# Altium PCB DE-120824.PcbDoc (part 2 of 2)
Units mil, origin at the board's own origin, x right, y up, seen from the top; angles counter-clockwise.
Board outline 2677.17 x 5787.4 mil, 4 copper layers (Top Layer, GND, PWR, Bottom Layer), stack 30.634 mil thick; 144 components, 186 nets, 562 pads, 68 vias.
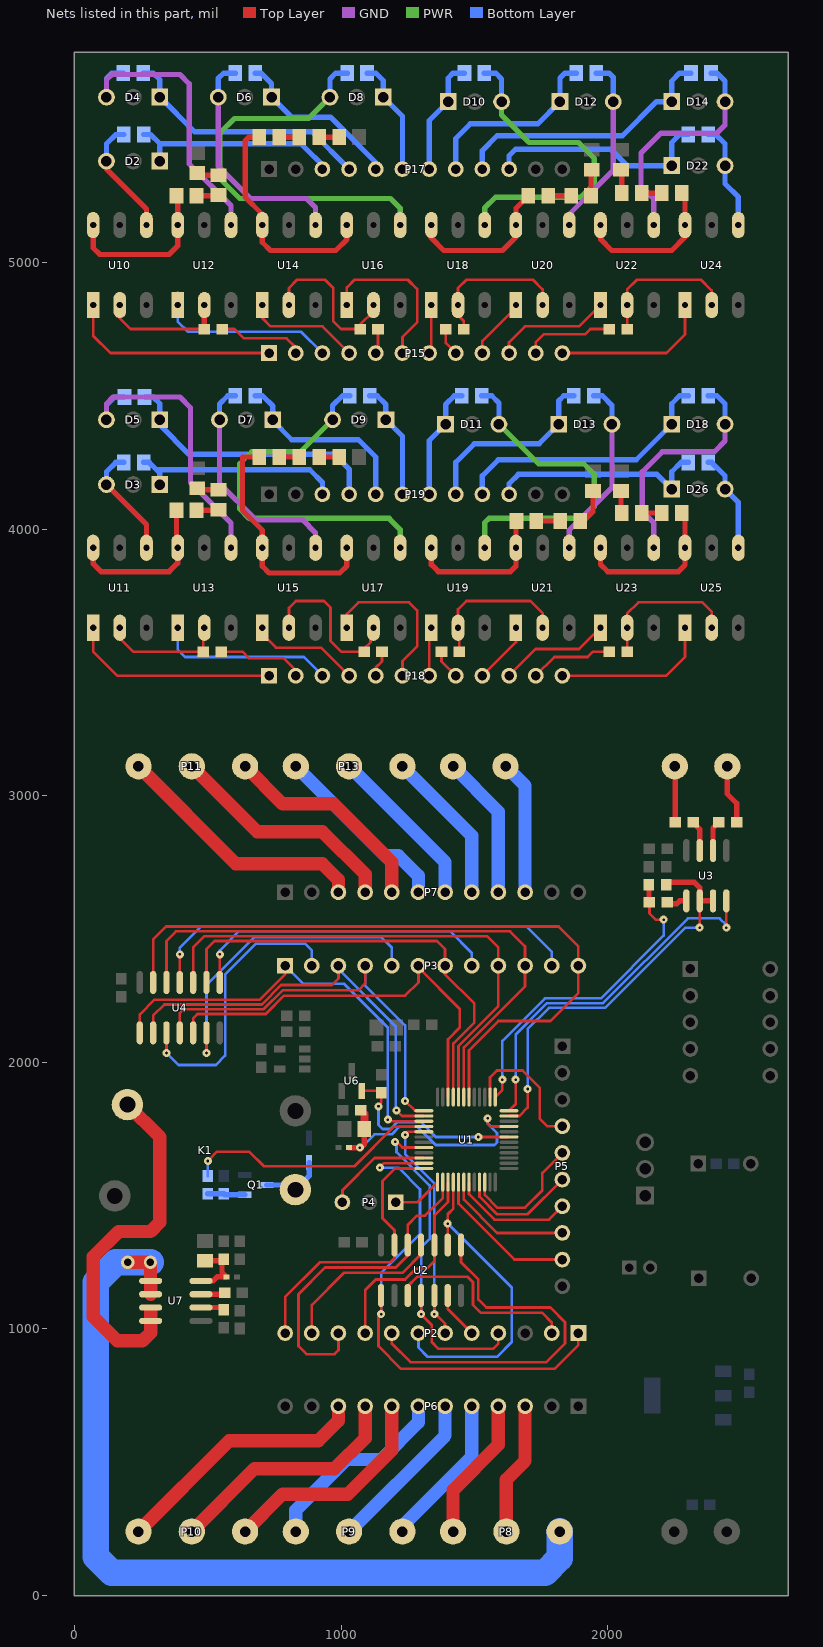
[diagram p4: the nets of this part, all layers, seen from the top]

## Via types
v1: diameter 30, hole 10, Top Layer to Bottom Layer, 56 vias
v2: diameter 50, hole 28, Top Layer to Bottom Layer, 12 vias

## Nets (pads, with @x,y where several pads share a name; then routed paths per layer and width w, separated by ;. In a path a pad name is that pad's centre, name@x,y a point inside that pad or via, vN(x,y) a via of type N, cw(c..) or ccw(c..) an arc to the next point about the centre after c; other vN are vias at no path point) (continued)
JAL0_UP: P2.1 U1.35 U2.1 | length 1947.5
  Top Layer w10: v1(1145,1605) 1161.42,1621.42 U1.35@1310.55,1621.42 ; U2.1@1150,1125.51 v1(1150,1055) 1140,1045 1140,935 1225,850 1800,850 1890,940 P2.1@1890,984.25
  Bottom Layer w10: v1(1145,1605) 1214.54,1605 1296,1523.54 1296,1356 1150,1210 v1(1150,1055)
JAL1_DN: P2.6 U1.29 U2.5 | length 952.9
  Top Layer w10: v1(1240,1728) 1240,1730 1249.53,1739.53 U1.29@1310.55,1739.53 ; U2.5@1350,1125.51 1350,1060 1390,1020 P2.6@1390,984.25
  Bottom Layer w10: v1(1240,1728) 1240,1655.91 1350,1545.91 v1(1350,1055)
JAL1_UP: P2.4 U1.32 U2.4 | length 1334.9
  Top Layer w10: v1@1207.5,1702.5 1229.53,1680.47 U1.32@1310.55,1680.47 ; U2.4@1300,1125.51 v1(1300,1055) 1340,1015 1340,950 1365,925 1570,925 1590,945 P2.4@1590,984.25
  Bottom Layer w10: v1@1207.5,1702.5 1207.5,1662.96 1332,1538.46 1332,1336.54 1300,1304.54 v1(1300,1055) v1@1310.4,1055
  other v1: 1202.5,1701.5
JAL2_DN: P2.9 U1.39 U2.10 | length 783
  Top Layer w10: P2.9@1090,984.25 1090,1145 1130,1185 1240,1185 1280,1225 1320,1225 1350,1255 U2.10@1350,1314.49 1350,1425 1401.1,1476.1 U1.39@1401.1,1550.55
JAL2_UP: P2.7 U1.40 U2.9 | length 1220.6
  Top Layer w10: U2.9@1400,1314.49 v1@1400,1385 ; v1(1400,1395) 1400,1430 1420.79,1450.79 U1.40@1420.79,1550.55
  Bottom Layer w10: P2.7@1290,984.25 1290,930 1325,895 1585,895 1640,950 1640,1155 v1(1400,1395)
JAL3_DN: P2.12 U1.36 U2.13 | length 1089.4
  Top Layer w10: P2.12@790,984.25 790,1120 920,1250 1185,1250 1200,1265 U2.13@1200,1314.49 1200,1370 1155,1415 1155,1555 1201.73,1601.73 U1.36@1310.55,1601.73
JAL3_UP: P2.10 U1.38 U2.12 | length 1245.5
  Top Layer w10: P2.10@990,984.25 990,920 975,905 870,905 840,935 840,1130 940,1230 1205,1230 1250,1275 U2.12@1250,1314.49 1250,1390 1285,1425 1315,1425 1381.42,1491.42 U1.38@1381.42,1550.55
JAL4_DN: P3.3 U1.26 U4.2 | length 1613.9
  Top Layer w10: U4.2@295,2110.51 295,2175 337,2217 702.46,2217 775.46,2290 965,2290 990,2315 P3.3@990,2362.2 ; v1(1207.5,1820) 1228.92,1798.58 U1.26@1310.55,1798.58
  Bottom Layer w10: P3.3@990,2362.2 990,2350 1205,2135 1205,1817.5 v1@1202.5,1815
JAL4_UP: P3.1 U1.27 U4.1 | length 1673.1
  Top Layer w10: U4.1@245,2110.51 245,2180 300,2235 695,2235 790,2330 P3.1@790,2362.2 ; v1(1175,1785) 1181.1,1778.9 U1.27@1310.55,1778.9
  Bottom Layer w10: P3.1@790,2362.2 857.2,2295 1010,2295 1175,2130 v1(1175,1785)
JAL5_DN: P3.6 U1.22 U4.5 | length 1585.5
  Top Layer w10: U4.5@445,2110.51 445,2165 461,2181 717.37,2181 786.37,2250 1240,2250 1290,2300 P3.6@1290,2355 ; P3.6@1290,2362.2 P3.6@1290,2355 ; U1.22@1401.1,1869.45 1401.1,2086.1 1445,2130 1445,2200 P3.6@1290,2355
JAL5_UP: P3.4 U1.25 U4.4 | length 1535.4
  Top Layer w10: U4.4@395,2110.51 395,2185 409,2199 709.91,2199 780.91,2270 1065,2270 1090,2295 P3.4@1090,2362.2 ; v1(1240,1855) 1276.73,1818.27 U1.25@1310.55,1818.27
  Bottom Layer w10: P3.4@1090,2362.2 1090,2287.66 1240,2137.66 v1@1240,1857
JAL6_DN: P3.9 U1.20 U4.10 | length 1933.6
  Top Layer w10: U4.10@445,2299.49 445,2430 488,2473 1547,2473 1590,2430 P3.9@1590,2362.2 1590,2210.46 1440.47,2060.93 U1.20@1440.47,1869.45
JAL6_UP: P3.7 U1.21 U4.9 | length 1679.3
  Top Layer w10: U4.9@495,2299.49 495,2425 525,2455 1360,2455 1390,2425 P3.7@1390,2362.2 1390,2330 1500,2220 1500,2150 1420.79,2070.79 U1.21@1420.79,1869.45
JAL7_DN: P3.12 U1.18 U4.13 | length 2656.1
  Top Layer w10: U4.13@295,2299.49 295,2460 344,2509 1816,2509 1890,2435 P3.12@1890,2362.2 1890,2260 1785,2155 1590,2155 1479.84,2044.84 U1.18@1479.84,1869.45
JAL7_UP: P3.10 U1.19 U4.12 | length 2199.4
  Top Layer w10: U4.12@345,2299.49 345,2455 381,2491 1634,2491 1690,2435 P3.10@1690,2362.2 1690,2285 1460.16,2055.16 U1.19@1460.16,1869.45
JAL_0_DN: P6.4 P8.1 | length 540.4
  Top Layer w50: P8.1@1420,240 1420,395 1590,565 P6.4@1590,710
JAL_0_UP: P6.3 P8.2 | length 499
  Top Layer w50: P8.2@1620,240 1620,435 1690,505 P6.3@1690,710
JAL_1_DN: P6.6 P9.2 | length 619.1
  Bottom Layer w50: P9.2@1030,240 1390,600 P6.6@1390,710
JAL_1_UP: P6.5 P9.3 | length 577.7
  Bottom Layer w50: P9.3@1230,240 1230,260 1490,520 P6.5@1490,710
JAL_2_DN: P6.8 P10.3 | length 841.3
  Top Layer w50: P10.3@640,240 780,380 1025,380 1190,545 P6.8@1190,710
JAL_2_UP: P6.7 P9.1 | length 736.7
  Bottom Layer w50: P9.1@830,240 830,320 1020,510 1150,510 1290,650 P6.7@1290,710
JAL_3_DN: P6.10 P10.1 | length 976.9
  Top Layer w50: P10.1@240,240 580,580 915,580 990,655 P6.10@990,710
JAL_3_UP: P6.9 P10.2 | length 915
  Top Layer w50: P10.2@440,240 675,475 975,475 1090,590 P6.9@1090,710
JAL_4_DN: P7.4 P11.2 | length 885
  Top Layer w50: P11.2@440,3110 685,2865 930,2865 1090,2705 P7.4@1090,2637.8
JAL_4_UP: P7.3 P11.3 | length 973.2
  Top Layer w50: P11.3@240,3110 605,2745 930,2745 990,2685 P7.3@990,2637.8
JAL_5_DN: P7.6 P13.3 | length 692
  Bottom Layer w50: P13.3@830,3110 1165,2775 1215,2775 1290,2700 P7.6@1290,2637.8
JAL_5_UP: P7.5 P11.1 | length 811.3
  Top Layer w50: P11.1@640,3110 780,2970 970,2970 1190,2750 P7.5@1190,2637.8
JAL_6_DN: P7.8 P13.1 | length 579.9
  Bottom Layer w50: P13.1@1230,3110 1490,2850 P7.8@1490,2637.8
JAL_6_UP: P7.7 P13.2 | length 621.3
  Bottom Layer w50: P13.2@1030,3110 1390,2750 P7.7@1390,2637.8
JAL_7_DN: P7.10 P14.1 | length 502.5
  Bottom Layer w50: P14.1@1616.85,3110 1690,3036.85 P7.10@1690,2637.8
JAL_7_UP: P7.9 P14.2 | length 542.6
  Bottom Layer w50: P14.2@1420,3110 1590,2940 P7.9@1590,2637.8
L: P8.3 U7.1 U7.2 | length 3358.9
  Top Layer w50: v2(200,1250) v2(285,1250) 285,1180.51 U7.1@285.51,1180 U7.2@285.51,1130
  Bottom Layer w100: v2(285,1250) v2(200,1250) 155,1250 80,1175 80,145 140,85 1765,85 1820,140 P8.3@1820,240
LED_C1: P5.7 U1.43 | length 455.7
  Top Layer w10: U1.43@1479.84,1550.55 1479.84,1505.16 1575,1410 1780,1410 P5.7@1830,1460
LED_C2: P5.8 U1.42 | length 487.3
  Top Layer w10: U1.42@1460.16,1550.55 1460.16,1484.84 1585,1360 P5.8@1830,1360
LED_C3: P5.9 U1.41 | length 557.3
  Top Layer w10: U1.41@1440.47,1550.55 1440.47,1469.53 1650,1260 P5.9@1830,1260
LED_R1: P5.4 U1.14 | length 510
  Top Layer w10: U1.14@1558.58,1869.45 1558.58,1943.58 1584,1969 1681,1969 1745,1905 1745,1790 1775,1760 P5.4@1830,1760
LED_R2: P5.5 U1.46 | length 482.4
  Top Layer w10: U1.46@1538.9,1550.55 1538.9,1501.56 1585.46,1455 1690,1455 1755,1520 1755,1585 P5.5@1830,1660
LED_R3: P5.6 U1.45 | length 446.6
  Top Layer w10: U1.45@1519.21,1550.55 1519.21,1495.79 1585,1430 1700,1430 P5.6@1830,1560
LEDC1: 
LEDC2: 
LEDC3: 
LEDR1: 
LEDR2: 
LEDR3: 
NetC6_2: C6.2 C7.2 L1.2 U1.9 | length 982.8
  Top Layer w10: v1(1550,1790) 1550,1770 1560.79,1759.21 U1.9@1629.45,1759.21
  Top Layer w20: L1.2@1029.69,1680 1075,1680 1087.4,1692.4 C6.2@1087.4,1750
  Top Layer w30: C7.2@1073.46,1820 1087.4,1806.06 C6.2@1087.4,1750
  Bottom Layer w10: v1@1072.5,1677.5 1125,1730 1190,1730 1218,1758 1287,1758 1355,1690 1575,1690 1585,1700 1585,1735 1550,1770 v1(1550,1790)
  other v1: 1070,1680
NetC10_2: C10.2 C11.2 L2.1 U7.8 | length 232.5
  Top Layer w20: U7.8@474.49,1180 520,1180 535,1195 L2.1@570.32,1195 553.46,1211.85 553.46,1255 C10.2@490,1255
NetC13_2: C13.2 U7.6 | length 88.9
  Top Layer w20: U7.6@474.49,1080 551.93,1080 C13.2@560,1071.93
NetD1_2: D1.2 K1.1 Q1.3 | length 237.2
  Bottom Layer w20: Q1.3@721.34,1540 810.94,1540 K1.1@828.58,1522.36 880,1573.78 D1.2@880,1623.74
NetD2_1: D2.1 P17.3 R19.2 | length 808.8
  Bottom Layer w20: R19.2@260,5480 285,5480 320,5445 850,5445 945,5350 P17.3@930,5350 ; D2.1@320,5380 320,5435
NetD2_3: D2.3 R19.1 U10.4 | length 446.8
  Top Layer w20: D2.3@120,5380 120,5350 270,5200 U10.4@270,5140
  Bottom Layer w20: D2.3@120,5380 120,5445 155,5480 R19.1@185.2,5480
NetD3_1: D3.1 P19.3 R21.2 | length 806.8
  Bottom Layer w20: R21.2@260,4250 280,4250 307.5,4222.5 ; D3.1@320,4166.93 320,4210 307.5,4222.5 ; P19.3@930,4130 930,4175 882.5,4222.5 307.5,4222.5
NetD3_3: D3.3 R21.1 U11.4 | length 426.8
  Top Layer w20: D3.3@120,4166.93 270,4016.93 U11.4@270,3930
  Bottom Layer w20: D3.3@120,4166.93 120,4215 155,4250 R21.1@185.2,4250
NetD4_1: D4.1 P17.4 R22.2 | length 959.8
  Bottom Layer w20: R22.2@257.4,5710 295,5710 320,5685 D4.1@320,5620 450,5490 890,5490 P17.4@1030,5350
NetD4_3: D4.3 R22.1 U12.4 | length 1133.8
  GND w20: D4.3@120,5620 120,5685 140,5705 395,5705 430,5670 430,5370 587.14,5212.86 U12.4@587.14,5140
  Bottom Layer w20: D4.3@120,5620 120,5690 140,5710 R22.1@182.6,5710
NetD5_1: D5.1 P19.4 R23.2 | length 1021.3
  Bottom Layer w20: R23.2@262.4,4495 295,4495 320,4470 D5.1@320,4410 320,4390 430,4280 975,4280 1030,4225 P19.4@1030,4130
NetD5_3: D5.3 R23.1 U13.4 | length 1125
  GND w20: D5.3@120,4410 120,4470 145,4495 395,4495 435,4455 435,4175 587.14,4022.86 U13.4@587.14,3930
  Bottom Layer w20: D5.3@120,4410 120,4465 150,4495 R23.1@187.6,4495
NetD6_1: D6.1 P17.5 R31.2 | length 646.2
  Bottom Layer w20: R31.2@677.4,5710 700,5710 739.08,5670.92 D6.1@739.08,5620 814.08,5545 960,5545 1130,5375 P17.5@1130,5350
NetD6_3: D6.3 R31.1 U14.4 | length 895.6
  GND w20: D6.3@539.08,5620 539.08,5360.92 660,5240 870,5240 904.29,5205.71 U14.4@904.29,5140
  Bottom Layer w20: D6.3@539.08,5620 539.08,5689.08 560,5710 R31.1@602.6,5710
NetD7_1: D7.1 P19.5 R33.2 | length 720.1
  Bottom Layer w20: R33.2@677.4,4500 705,4500 744,4461 D7.1@744,4410 744,4406 815,4335 1065,4335 1130,4270 P19.5@1130,4130
NetD7_3: D7.3 R33.1 U15.4 | length 862.2
  GND w20: D7.3@544,4410 544,4171 680,4035 855,4035 904.29,3985.71 U15.4@904.29,3930
  Bottom Layer w20: D7.3@544,4410 544,4469 575,4500 R33.1@602.6,4500
NetD8_1: D8.1 P17.6 R34.2 | length 434
  Bottom Layer w20: R34.2@1097.4,5710 1130,5710 1158.16,5681.84 D8.1@1158.16,5620 1230,5548.16 P17.6@1230,5350
NetD8_3: D8.3 R34.1 U16.4 | length 1566.9
  PWR w20: D8.3@958.16,5620 878.16,5540 600,5540 545,5485 545,5315 620,5240 1185,5240 1221.43,5203.57 U16.4@1221.43,5140
  Bottom Layer w20: D8.3@958.16,5620 958.16,5688.16 980,5710 R34.1@1022.6,5710
NetD9_1: D9.1 P19.6 R35.2 | length 436.9
  Bottom Layer w20: R35.2@1107.4,4500 1135,4500 1168,4467 D9.1@1168,4410 1230,4348 P19.6@1230,4130
NetD9_3: D9.3 R35.1 U17.4 | length 1420.9
  PWR w20: D9.3@968,4410 848,4290 665,4290 620,4245 620,4075 655,4040 1180,4040 1221.43,3998.57 U17.4@1221.43,3930
  Bottom Layer w20: D9.3@968,4410 968,4463 1005,4500 R35.1@1032.6,4500
NetD10_1: D10.1 P17.7 R43.2 | length 439.9
  Bottom Layer w20: P17.7@1330,5350 1330,5531.23 D10.1@1401.84,5603.07 1401.84,5691.84 1420,5710 R43.2@1462.6,5710
NetD10_3: D10.3 R43.1 U18.4 | length 1232.1
  PWR w20: U18.4@1538.57,5140 1538.57,5203.57 1580,5245 1900,5245 1950,5295 1950,5390 1890,5450 1705,5450 1601.84,5553.16 D10.3@1601.84,5603.07
  Bottom Layer w20: R43.1@1537.4,5710 1580,5710 1601.84,5688.16 D10.3@1601.84,5603.07
NetD11_1: D11.1 P19.7 R45.2 | length 436.9
  Bottom Layer w20: P19.7@1330,4130 1330,4331.07 D11.1@1392,4393.07 1392,4467 1425,4500 R45.2@1452.6,4500
NetD11_3: D11.3 R45.1 U19.4 | length 1242.1
  PWR w20: U19.4@1538.57,3930 1538.57,4023.57 1555,4040 1905,4040 1950,4085 1950,4205 1910,4245 1740.07,4245 D11.3@1592,4393.07
  Bottom Layer w20: R45.1@1527.4,4500 1565,4500 1592,4473 D11.3@1592,4393.07
NetD12_1: D12.1 P17.8 R46.2 | length 720.5
  Bottom Layer w20: P17.8@1430,5350 1430,5465 1485,5520 1737.85,5520 D12.1@1820.92,5603.07 1820.92,5690.92 1840,5710 R46.2@1882.6,5710
NetD12_3: D12.3 R46.1 U20.4 | length 692.6
  GND w20: U20.4@1855.71,5140 1855.71,5180.71 2020.92,5345.92 D12.3@2020.92,5603.07
  Bottom Layer w20: R46.1@1957.4,5710 2005,5710 2020.92,5694.08 D12.3@2020.92,5603.07
NetD13_1: D13.1 P19.8 R47.2 | length 717.7
  Bottom Layer w20: P19.8@1430,4130 1430,4250 1500,4320 1742.93,4320 D13.1@1816,4393.07 1816,4481 1835,4500 R47.2@1872.6,4500
NetD13_3: D13.3 R47.1 U21.4 | length 683.9
  GND w20: U21.4@1855.71,3930 1855.71,3995.71 2016,4156 D13.3@2016,4393.07
  Bottom Layer w20: R47.1@1947.4,4500 1980,4500 2016,4464 D13.3@2016,4393.07
NetD14_1: D14.1 P17.9 R56.2 | length 1017.8
  Bottom Layer w20: P17.9@1530,5350 1530,5420 1585,5475 2055,5475 2183.07,5603.07 D14.1@2240,5603.07 2240,5680 2270,5710 R56.2@2312.6,5710
NetD14_3: D14.3 R56.1 U22.4 | length 878.3
  GND w20: U22.4@2172.86,5140 2172.86,5237.14 2125,5285 2125,5410 2200,5485 2410,5485 2440,5515 D14.3@2440,5603.07
  Bottom Layer w20: R56.1@2387.4,5710 2410,5710 2440,5680 D14.3@2440,5603.07
NetD15_1: 
NetD18_1: D18.1 P19.9 R59.2 | length 1011.9
  Bottom Layer w20: P19.9@1530,4130 1530,4200 1590,4260 2106.93,4260 D18.1@2240,4393.07 2240,4470 2270,4500 R59.2@2302.6,4500
NetD18_3: D18.3 R59.1 U23.4 | length 875.4
  GND w20: U23.4@2172.86,3930 2172.86,4022.14 2130,4065 2130,4215 2205,4290 2400,4290 2440,4330 D18.3@2440,4393.07
  Bottom Layer w20: R59.1@2377.4,4500 2410,4500 2440,4470 D18.3@2440,4393.07
NetD19_1: 
NetD22_1: D22.1 P17.10 R61.2 | length 858
  Bottom Layer w20: P17.10@1630,5350 1630,5400 1655,5425 2010,5425 2071.93,5363.07 D22.1@2240,5363.07 2240,5450 2270,5480 R61.2@2302.6,5480
NetD22_3: D22.3 R61.1 U24.4 | length 402.8
  Bottom Layer w20: R61.1@2377.4,5480 2405,5480 2440,5445 D22.3@2440,5363.07 2440,5295 2490,5245 U24.4@2490,5140
NetD23_1: 
NetD26_1: D26.1 P19.10 R62.2 | length 829.4
  Bottom Layer w20: P19.10@1630,4130 1630,4170 1665,4205 2185,4205 D26.1@2240,4150 2240,4215 2275,4250 R62.2@2302.6,4250
NetD26_3: D26.3 R62.1 U25.4 | length 374
  Bottom Layer w20: R62.1@2377.4,4250 2390,4250 2440,4200 D26.3@2440,4150 2490,4100 U25.4@2490,3930
NetK1_4: K1.4 U7.3 U7.4 | length 1365.5
  Top Layer w50: K1.4@198.66,1841.26 320,1719.92 320,1400 285,1365 165,1365 70,1270 70,1045 160,955 255,955 285.51,985.51 U7.4@285.51,1030 285.51,1064.49 285,1065
NetP1_1: P1.1 R3.1 | length 210.6
  Top Layer w20: P1.1@2251.57,3110 2253.07,3108.5 R3.1@2253.07,2900
NetP1_2: P1.2 R2.1 | length 224.5
  Top Layer w20: P1.2@2448.43,3110 2448.43,3006.57 2483.46,2971.54 R2.1@2483.46,2900
NetP2_2: P2.2 U2.3 | length 749.9
  Top Layer w10: U2.3@1250,1125.51 1250,1160 1285,1195 1475,1195 1495,1175 1495,1090 1525,1060 1755,1060 1790,1025 P2.2@1790,984.25
NetP2_5: P2.5 U2.6 | length 178.5
  Top Layer w10: U2.6@1400,1125.51 1400,1074.25 P2.5@1490,984.25
NetP2_8: P2.8 U2.8 | length 1418.9
  Top Layer w10: P2.8@1190,984.25 1190,945 1260,875 1770,875 1840,945 1840,1025 1785,1080 1545,1080 1515,1110 1515,1185 1450,1250 U2.8@1450,1314.49
NetP2_11: P2.11 U2.11 | length 628.9
  Top Layer w10: P2.11@890,984.25 890,1090 1010,1210 1230,1210 1300,1280 U2.11@1300,1314.49
NetP3_2: P3.2 U4.3 | length 1074.4
  Top Layer w10: v1(345,2035) U4.3@345,2110.51
  Bottom Layer w10: v1(345,2035) 390,1990 530,1990 565,2025 565,2330 680,2445 865,2445 890,2420 P3.2@890,2362.2
NetP3_5: P3.5 U4.6 | length 1184.4
  Top Layer w10: v1(495,2035) U4.6@495,2110.51
  Bottom Layer w10: v1(495,2035) 495,2290 675,2470 1150,2470 1190,2430 P3.5@1190,2362.2
NetP3_8: P3.8 U4.8 | length 1177.1
  Top Layer w10: U4.8@545,2299.49 v1(545,2405)
  Bottom Layer w10: v1(545,2405) 545,2420 617,2492 1408,2492 1490,2410 P3.8@1490,2362.2
NetP3_11: P3.11 U4.11 | length 1650.8
  Top Layer w10: U4.11@395,2299.49 v1(395,2405)
  Bottom Layer w10: v1(395,2405) 395,2430 475,2510 1695,2510 1790,2415 P3.11@1790,2362.2
NetP15_1: P15.1 U10.1 | length 801.9
  Top Layer w10: U10.1@70,4840 70,4725 135,4660 P15.1@730,4660
NetP15_2: P15.2 R18.1 | length 325.5
  Top Layer w10: R18.1@553.46,4750 600,4750 635,4715 795,4715 830,4680 P15.2@830,4660
NetP15_3: P15.3 U12.1 | length 726
  Top Layer w10: U12.1@387.14,4840 U12.1@387.14,4887.14 ; P15.3@930,4660 P15.3@930,4685
  Bottom Layer w10: U12.1@387.14,4840 387.14,4777.86 425,4740 850,4740 P15.3@930,4660
NetP15_4: P15.4 U14.1 | length 429.1
  Top Layer w10: U14.1@704.29,4840 704.29,4790.71 735,4760 930,4760 P15.4@1030,4660
NetP15_5: P15.5 R30.1 | length 93.5
  Top Layer w10: P15.5@1130,4660 1138.46,4668.46 R30.1@1138.46,4750
NetP15_6: P15.6 U16.1 | length 619.1
  Top Layer w10: U16.1@1021.43,4840 1021.43,4906.43 1050,4935 1250,4935 1285,4900 1285,4775 1230,4720 P15.6@1230,4660
NetP15_7: P15.7 U18.1 | length 183.6
  Top Layer w10: P15.7@1330,4660 1338.57,4668.57 U18.1@1338.57,4840
NetP15_8: P15.8 R42.1 | length 105.3
  Top Layer w10: R42.1@1393.07,4750 1393.07,4696.93 P15.8@1430,4660
NetP15_9: P15.9 U20.1 | length 232.1
  Top Layer w10: P15.9@1530,4660 1530,4705 1655.71,4830.71 U20.1@1655.71,4840
NetP15_10: P15.10 U22.1 | length 440.8
  Top Layer w10: P15.10@1630,4660 1630,4700 1690,4760 1892.86,4760 U22.1@1972.86,4840
NetP15_11: P15.11 R55.1 | length 337.2
  Top Layer w10: P15.11@1730,4660 1730,4700 1760,4730 1915,4730 1935,4750 R55.1@2006.54,4750
NetP15_12: P15.12 U24.1 | length 599
  Top Layer w10: P15.12@1830,4660 2220,4660 2290,4730 U24.1@2290,4840
NetP18_1: P18.1 U11.1 | length 787.3
  Top Layer w10: U11.1@70,3630 70,3540 160,3450 P18.1@730,3450
NetP18_2: P18.2 R20.1 | length 329
  Top Layer w10: R20.1@550,3540 630,3540 655,3515 785,3515 830,3470 P18.2@830,3450
NetP18_3: P18.3 U13.1 | length 690.5
  Top Layer w10: P18.3@930,3450 P18.3@930,3475
  Bottom Layer w10: U13.1@387.14,3630 387.14,3547.86 415,3520 860,3520 P18.3@930,3450
NetP18_4: P18.4 U15.1 | length 414.5
  Top Layer w10: U15.1@704.29,3630 704.29,3605.71 755,3555 925,3555 P18.4@1030,3450
NetP18_5: P18.5 R32.1 | length 99.7
  Top Layer w10: P18.5@1130,3450 1130,3480 1153.46,3503.46 R32.1@1153.46,3540
NetP18_6: P18.6 U17.1 | length 613.3
  Top Layer w10: U17.1@1021.43,3630 1021.43,3681.43 1065,3725 1255,3725 1285,3695 1285,3560 1230,3505 P18.6@1230,3450
NetP18_7: P18.7 U19.1 | length 183.6
  Top Layer w10: P18.7@1330,3450 1330,3621.43 U19.1@1338.57,3630
NetP18_8: P18.8 R44.1 | length 112.1
  Top Layer w10: R44.1@1376.54,3540 1376.54,3503.46 P18.8@1430,3450
NetP18_9: P18.9 U21.1 | length 232.1
  Top Layer w10: P18.9@1530,3450 1655.71,3575.71 U21.1@1655.71,3630
NetP18_10: P18.10 U23.1 | length 417.4
  Top Layer w10: P18.10@1630,3450 1730,3550 1892.86,3550 U23.1@1972.86,3630
NetP18_11: P18.11 R57.1 | length 313.8
  Top Layer w10: P18.11@1730,3450 1800,3520 1925,3520 1945,3540 R57.1@2006.54,3540
NetP18_12: P18.12 U25.1 | length 599
  Top Layer w10: P18.12@1830,3450 2220,3450 2290,3520 U25.1@2290,3630
NetQ1_1: Q1.1 R10.1 R11.2 | length 140.3
  Bottom Layer w20: R10.1@500,1506.54 R11.2@560,1506.54 563.94,1502.6 Q1.1@638.66,1502.6
NetR2_2: R2.2 U3.6 | length 114.4
  Top Layer w20: U3.6@2395,2794.49 2395,2878.46 R2.2@2416.54,2900
NetR3_2: R3.2 U3.7 | length 115.9
  Top Layer w20: R3.2@2320,2900 2345,2875 U3.7@2345,2794.49
NetR4_2: R4.2 U3.1 | length 78
  Top Layer w20: R4.2@2223.46,2600 2228.46,2595 2260,2595 2270.51,2605.51 U3.1@2295,2605.51
NetR8_1: R8.1 U1.7 U6.2 | length 730.5
  Top Layer w10: U6.2@1077.4,1892.6 1143.94,1892.6 R8.1@1150,1886.54 1150,1848.95 1140,1838.95 v1(1140,1835) ; v1(1515,1720) 1515.16,1719.84 U1.7@1629.45,1719.84
  Bottom Layer w10: v1(1140,1835) 1140,1765 1155,1750 1184.54,1750 1210.54,1776 1299,1776 1355,1720 v1(1515,1720)
NetR9_2: R9.2 U7.7 | length 90.7
  Top Layer w20: U7.7@474.49,1130 558.07,1130 R9.2@563.07,1135
NetR12_1: R12.1 U10.6 U12.6 | length 615.6
  Top Layer w20: U10.6@70,5140 70,5055 95,5030 355,5030 387.14,5062.14 U12.6@387.14,5140 387.14,5245.46 R12.1@382.6,5250
NetR12_2: R12.2 R13.1 | length 83.7
  Top Layer w20: R12.2@457.4,5250 537.4,5250 R13.1@540,5252.6
NetR13_2: R13.2 R14.1 | length 83.2
  Top Layer w20: R14.1@460,5335.2 467.8,5327.4 R13.2@540,5327.4
NetR15_1: R15.1 U11.6 U13.6 | length 602.6
  Top Layer w20: U11.6@70,3930 70,3870 100,3840 355,3840 387.14,3872.14 U13.6@387.14,3930 382.6,3934.54 R15.1@382.6,4070
NetR15_2: R15.2 R16.1 | length 83.7
  Top Layer w20: R15.2@457.4,4070 537.4,4070 R16.1@540,4072.6
NetR16_2: R16.2 R17.1 | length 82.2
  Top Layer w20: R17.1@460,4152.6 465.2,4147.4 R16.2@540,4147.4
NetR18_2: R18.2 U10.2 U12.2 | length 473.4
  Top Layer w10: U10.2@170,4840 170,4790 210,4750 R18.2@486.54,4750
  Top Layer w20: R18.2@486.54,4750 486.54,4839.39 U12.2@487.14,4840
NetR20_2: R20.2 U11.2 U13.2 | length 465.5
  Top Layer w10: U11.2@170,3630 170,3590 220,3540 R20.2@483.07,3540 483.07,3625.93 U13.2@487.14,3630
NetR24_1: R24.1 U14.6 U16.6 | length 865.3
  Top Layer w20: R24.1@692.6,5470 655,5470 640,5455 640,5245 704.29,5180.71 U14.6@704.29,5140 704.29,5075.71 735,5045 980,5045 1021.43,5086.43 U16.6@1021.43,5140
NetR24_2: R24.2 R25.1 | length 75.2
  Top Layer w20: R24.2@767.4,5470 R25.1@842.6,5470
NetR25_2: R25.2 R26.1 | length 75.2
  Top Layer w20: R25.2@917.4,5470 R26.1@992.6,5470
NetR27_1: R27.1 U15.6 U17.6 | length 910
  Top Layer w20: R27.1@692.6,4270 630,4270 630,4070 704.29,3995.71 U15.6@704.29,3930 704.29,3860.71 730,3835 995,3835 1021.43,3861.43 U17.6@1021.43,3930
NetR27_2: R27.2 R28.1 | length 75.2
  Top Layer w20: R27.2@767.4,4270 R28.1@842.6,4270
NetR28_2: R28.2 R29.1 | length 75.2
  Top Layer w20: R28.2@917.4,4270 R29.1@992.6,4270
NetR30_2: R30.2 U14.2 U16.2 | length 604.8
  Top Layer w10: U14.2@804.29,4840 804.29,4904.29 835,4935 940,4935 970,4905 970,4780 1000,4750 R30.2@1071.54,4750 1071.54,4766.54 1121.43,4816.43 U16.2@1121.43,4840
NetR32_2: R32.2 U15.2 U17.2 | length 623.6
  Top Layer w10: U15.2@804.29,3630 804.29,3704.29 830,3730 935,3730 960,3705 960,3580 1000,3540 R32.2@1086.54,3540 1086.54,3551.54 1110,3575 1110,3618.57 U17.2@1121.43,3630
NetR36_1: R36.1 U18.6 U20.6 | length 579.7
  Top Layer w20: U18.6@1338.57,5140 1338.57,5091.43 1385,5045 1605,5045 1655.71,5095.71 U20.6@1655.71,5140 1655.71,5203.12 R36.1@1702.6,5250
NetR36_2: R36.2 R37.1 | length 85.2
  Top Layer w20: R36.2@1777.4,5250 R37.1@1862.6,5250
NetR37_2: R37.2 R38.1 | length 98.7
  Top Layer w20: R37.2@1937.4,5250 1937.4,5345 R38.1@1940,5347.6
NetR39_1: R39.1 U19.6 U21.6 | length 570.3
  Top Layer w20: U19.6@1338.57,3930 1338.57,3866.43 1365,3840 1635,3840 1655.71,3860.71 U21.6@1655.71,3930 1655.71,4028.12 R39.1@1657.6,4030
NetR39_2: R39.2 R40.1 | length 90.2
  Top Layer w20: R39.2@1732.4,4030 R40.1@1822.6,4030
NetR40_2: R40.2 R41.1 | length 139.7
  Top Layer w20: R40.2@1897.4,4030 1910,4030 1945,4065 R41.1@1945,4142.6
NetR42_2: R42.2 U18.2 U20.2 | length 566.7
  Top Layer w10: R42.2@1460,4750 1460,4780 1438.57,4801.43 U18.2@1438.57,4840 1438.57,4903.57 1470,4935 1720,4935 1755.71,4899.29 U20.2@1755.71,4840
NetR44_2: R44.2 U19.2 U21.2 | length 564
  Top Layer w10: R44.2@1443.46,3540 1443.46,3625.11 U19.2@1438.57,3630 1438.57,3698.57 1470,3730 1710,3730 1755.71,3684.29 U21.2@1755.71,3630
NetR48_1: R48.1 U22.6 U24.6 | length 578.4
  Top Layer w20: U22.6@1972.86,5140 1972.86,5087.14 2015,5045 2240,5045 2290,5095 U24.6@2290,5140 2290,5247.4 R48.1@2277.4,5260
NetR48_2: R48.2 R49.1 | length 75.2
  Top Layer w20: R49.1@2127.4,5260 R48.2@2202.6,5260
NetR49_2: R49.2 R50.1 | length 93.7
  Top Layer w20: R50.1@2050,5352.6 2052.6,5350 R49.2@2052.6,5260
NetR51_1: R51.1 U23.6 U25.6 | length 601.8
  Top Layer w20: U23.6@1972.86,3930 1972.86,3867.14 2000,3840 2265,3840 2290,3865 U25.6@2290,3930 2290,4047.4 R51.1@2277.4,4060
NetR51_2: R51.2 R52.1 | length 75.2
  Top Layer w20: R52.1@2127.4,4060 R51.2@2202.6,4060
NetR52_2: R52.2 R53.1 | length 83.7
  Top Layer w20: R53.1@2050,4142.6 2050,4062.6 R52.2@2052.6,4060
NetR55_2: R55.2 U22.2 U24.2 | length 552.2
  Top Layer w10: R55.2@2073.46,4750 2073.46,4839.39 U22.2@2072.86,4840 2072.86,4897.86 2110,4935 2350,4935 2390,4895 U24.2@2390,4840
NetR57_2: R57.2 U23.2 U25.2 | length 552.2
  Top Layer w10: R57.2@2073.46,3540 2073.46,3629.39 U23.2@2072.86,3630 2072.86,3682.86 2115,3725 2355,3725 2390,3690 U25.2@2390,3630
NetU4_14: 
RELAY: R10.2 U1.28 | length 966.2
  Top Layer w10: v1(500,1630) 535,1665 655,1665 710,1610 1050,1610 1198.43,1758.43 1309.77,1758.43 U1.28@1310.55,1759.21
  Bottom Layer w10: R10.2@500,1573.46 v1(500,1630)
SWCLK: P4.1 U1.37 | length 188
  Top Layer w10: P4.1@1205,1475 1286.18,1475 U1.37@1361.73,1550.55
SWDIO: P4.3 U1.34 | length 400.7
  Top Layer w10: P4.3@1005,1475 1005,1520 1126.1,1641.1 U1.34@1310.55,1641.1
USART1_DE: R1.2 U1.11 U3.2 U3.3 | length 1517.2
  Top Layer w10: U1.11@1629.45,1798.58 1668.58,1798.58 1700,1830 v1(1700,1900) ; v1(2345,2505) U3.2@2345,2605.51
  Top Layer w20: R1.2@2220,2666.54 2228.46,2675 2325,2675 2345,2655 U3.2@2345,2605.51 U3.3@2395,2605.51
  Bottom Layer w10: v1(1700,1900) 1700,2124.09 1779.91,2204 1989.91,2204 2290.91,2505 v1(2345,2505)
USART1_RX: R4.1 R5.1 U1.13 | length 1224.4
  Top Layer w10: U1.13@1578.27,1869.45 1605,1896.18 v1(1605,1935) ; R4.1@2156.54,2600 2156.54,2558.46 2180,2535 v1(2210,2535)
  Top Layer w20: R5.1@2154.57,2666.54 2154.57,2601.97 R4.1@2156.54,2600
  Bottom Layer w10: v1(1605,1935) 1605,2080 1765,2240 1975,2240 2210,2475 2210,2530 v1@2215,2535
USART1_TX: U1.12 U3.4 | length 1388.1
  Top Layer w10: U1.12@1629.45,1818.27 1655,1843.82 v1(1655,1935) ; v1(2445,2505) U3.4@2445,2605.51
  Bottom Layer w10: v1(1655,1935) 1655,2104.54 1772.46,2222 1982.46,2222 2300.46,2540 2420,2540 2445,2515 v1(2445,2505)
pads on no net: U10.3 U10.5 U11.3 U11.5 U12.3 U12.5 U13.3 U13.5 U14.3 U14.5 U15.3 U15.5 U16.3 U16.5 U17.3 U17.5 U18.3 U18.5 U19.3 U19.5 U20.3 U20.5 U21.3 U21.5 U22.3 U22.5 U23.3 U23.5 U24.3 U24.5 U25.3 U25.5

## Polygon pours and split planes (outlines as drawn)
GND on GND "Bottom Layer-No Net" (solid, remove dead copper, pour order 0): 2655,60 2010,60 2010,865 495,865 435,925 435,1870 335,1970 165,1970 165,2429.44 210.29,2515 1975,2515 2050,2590 2050,3260 2065,3275 2655,3275

## Keep-outs
Keep-Out Layer:
  lines w10: 0,3346.46 2677.17,3346.46 ; 0,4566.93 2677.17,4566.93 ; 0,0 2677.17,0 2677.17,5787.4 0,5787.4 0,0

## Other copper
Top Layer:
  rectangle net 3V3: 2050,530 2375,950
  rectangle net GND: 1415,1605 1490,1810
  rectangle net GND: 1415,1605 1575,1665
Bottom Layer:
  rectangle net 3V3: 2050,530 2375,950

## Silkscreen, mask and mechanical layers (free items; w line width, h text height)
Top Overlay:
  text "J7DN J7UP J6DN J6UP J5DN J5UP J4DN J4UP" at 1705,3325 h40 r180
  text "A RS485 B" at 2515,3325 h40 r180
  text "DE-120824" at 145,2810 h60
  text "AUG. 2024." at 145,2715 h60
  text "A0 A1 A2 A3 A4" at 2250,1935 h32 r90
  text "ADDRESS" at 2490,1930 h60 r90
  text "iMEDIA" at 1400,530 h60
  text "www.imedia.ba" at 135,445 h60
  text "Sarajevo BiH" at 1215,440 h60
  text "+12V  GND" at 2175,25 h40
  text "J3DN J3UP J2DN J2UP J1DN J1UP J0DN J0UP LIVE" at 170,20 h40

## Dimensions
790,984.25 to 0,0 on Mechanical 1
790,2362.2 to 0,3346.46 on Mechanical 1
240,3110 to 0,5787.4 on Mechanical 1
240,240 to 0,0 on Mechanical 1
240,240 to 0,0 on Mechanical 1

## Text inside footprints (layer, text, board x,y; h text height)
C15: Top Overlay "+" at 2185.47,1160.47 h30
C16: Top Overlay "+" at 2183.9,1590.47 h30
C17: Top Overlay "+" at 1963.5,1200.47 h30